# Altium PCB sterio_mic PCB.PcbDoc
Units mm, origin at the board's own origin, x right, y up, seen from the top; angles counter-clockwise.
Board outline 17 x 26.5 mm, 2 copper layers (Top Layer, Bottom Layer), stack 1.57 mm thick; 18 components, 13 nets, 49 pads, 0 vias.
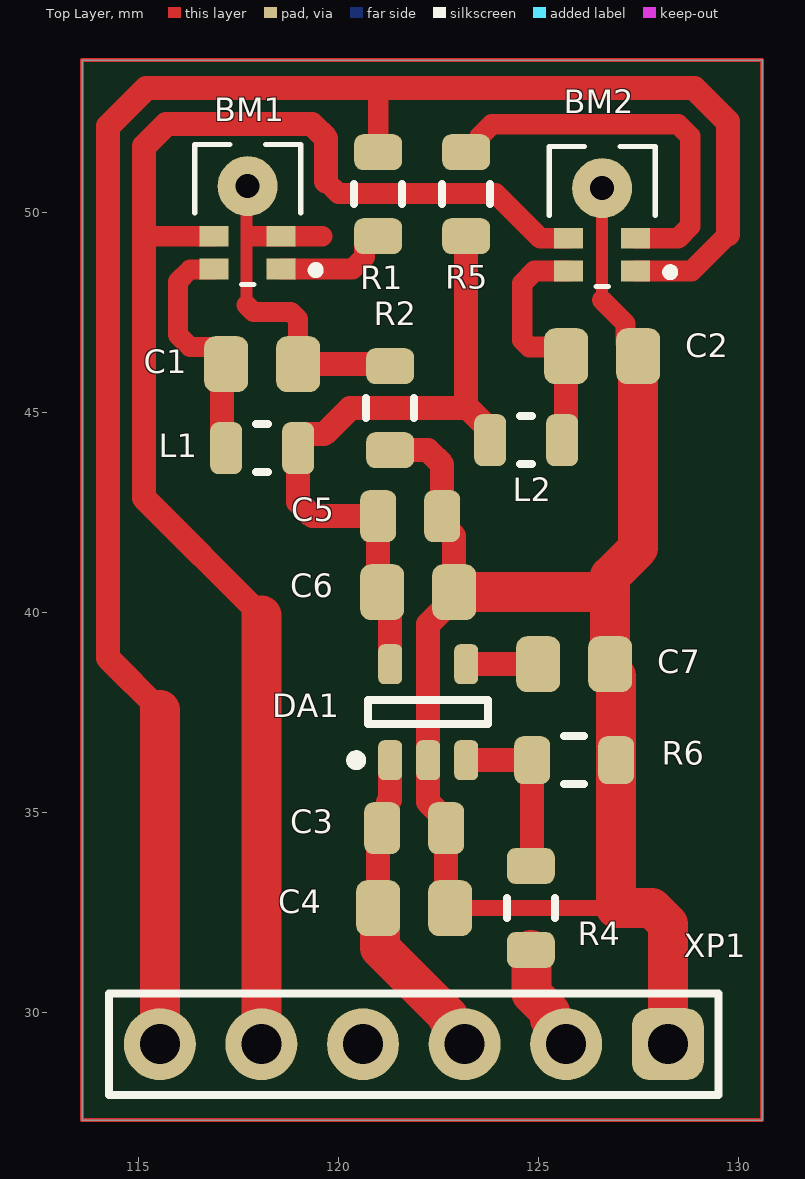
[diagram p0: Top Layer view]
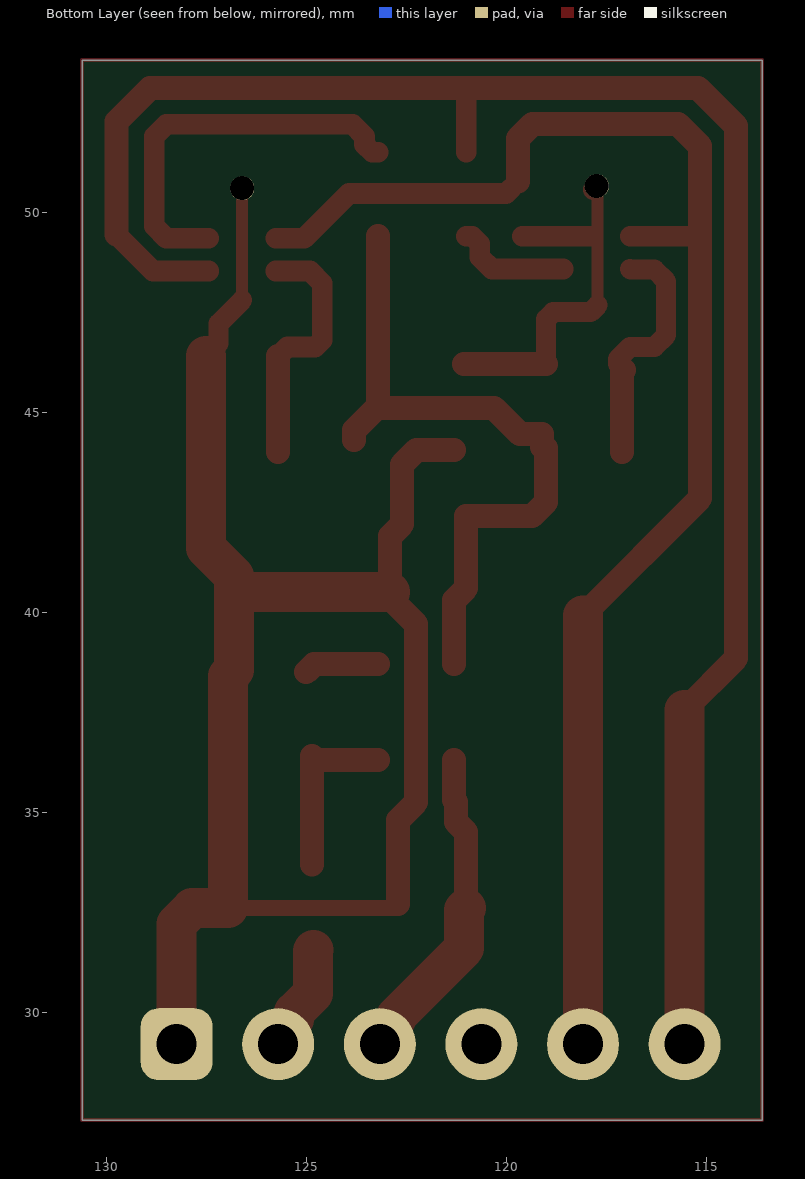
[diagram p1: Bottom Layer view, seen from below]
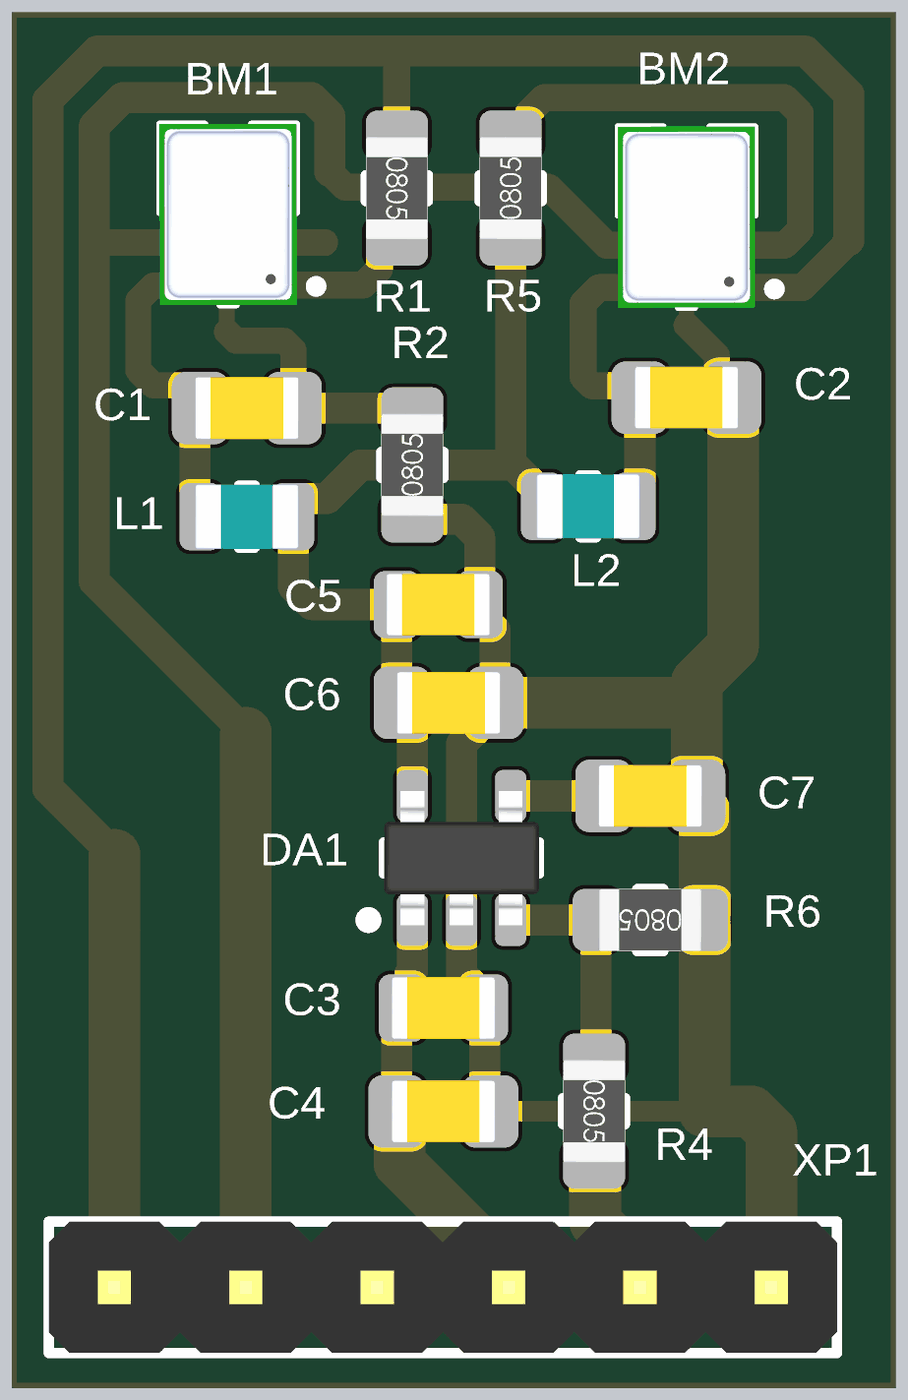
[diagram p2: 3D render of the assembled board from above, using the file's embedded part models]

## Layer stack, top to bottom
Top Solder: solder mask 0.0127, Solder Resist, Dk 3.8
Top Layer: signal copper 0.035
Dielectric: core 1.5, FR-4, Dk 4.5
Bottom Layer: signal copper 0.035
Bottom Solder: solder mask 0.0127, Solder Resist, Dk 3.8

## Board outline
113.6,27.3 113.6,53.8 130.6,53.8 130.6,27.3

## Design rules (kind name [scope] priority, off if disabled: settings)
BoardOutlineClearance [All] p1: gap=0.2 ignorepadtopadclearanceinfootprint=FALSE
Clearance [All] p1: gap=0.3 ignorepadtopadclearanceinfootprint=FALSE
ComponentClearance [All] p1: gap=0.127 collisioncheckmode=3 verticalgap=0.127 showdistances=TRUE
DiffPairsRouting [All] p1: maxlimit=0.254 minlimit=0.127 mostfreqgap=0.127 toplayer_minwidth=0.127 toplayer_maxwidth=25.4 toplayer_prefwidth=0.127 bottomlayer_minwidth=0.127 bottomlayer_maxwidth=25.4 bottomlayer_prefwidth=0.127 maxuncoupledlength=12.7
Height [All] p1: minheight=0 maxheight=1816.048 prefheight=12.7
HoleSize [All] p1: absolutevalues=TRUE maxlimit=6.3 minlimit=0.3 maxpercent=80.000 minpercent=20.000
HoleToHoleClearance [All] p1: gap=0.25 allowstackedmicrovias=FALSE
MinimumAnnularRing [All] p1: minimumring=0.076
MinimumSolderMaskSliver [All] p1: minsoldermaskwidth=0
PlaneClearance [All] p1: clearance=0.127
PlaneConnect PlaneConnectPowerPads [InPadClass('PowerPads')] p1: planeconnectstyle=Direct reliefexpansion=0.508 reliefentries=4 reliefconductorwidth=0.254 reliefairgap=0.254
PlaneConnect [All] p2: planeconnectstyle=Direct reliefexpansion=0.3 reliefentries=4 reliefconductorwidth=0.127 reliefairgap=0.127
PolygonConnect PolygonConnectPowerPads [All vs (InPadClass('PowerPads'))] p1: connectstyle=Direct reliefconductorwidth=0.254 reliefentries=4 polygonreliefangle="90 Angle" airgapwidth=0.254
PolygonConnect [All] p2: connectstyle=Direct reliefconductorwidth=0.127 reliefentries=4 polygonreliefangle="90 Angle" airgapwidth=0.127
RoutingVias [All] p1: holewidth=0.3 width=0.6 viastyle="Through Hole" minholewidth=0.3 minwidth=0.6 maxholewidth=0.6 maxwidth=6.6
SilkToSilkClearance [All] p1: silktosilkclearance=0
SilkToSolderMaskClearance [IsPad] p1: minsilkscreentomaskgap=0.127 clearancetoexposedcopper=TRUE
SolderMaskExpansion [All] p1: expansion=0.075 istentingtop=FALSE
Width [All] p1: maxlimit=25.4 minlimit=0.127 preferedwidth=0.127 minimp=50.000000 maximp=50.000000 favimp=50.000000
20 further rules are at their usual default settings.

## Components (designator, comment, footprint, x,y, rotation, side; value= is the part's Value field where it differs from the comment)
BM1 "MMICT390200012" "5-Terminal LGA_CAV" 117.738,49.952 r180 top
BM2 "MMICT390200012" "5-Terminal LGA_CAV" 126.6,49.9 r180 top
C1 "CC0805KPX7R9BB104" CAPC0805_H0.95_N 118.1,46.2 r0 top
C2 "CC0805KPX7R9BB104" CAPC0805_H0.95_N 126.6,46.4 r0 top
C3 "CL21B106KOQNNNE" CAPC0805_H1.45_N 121.9,34.6 r0 top
C4 "CC0805KPX7R9BB104" CAPC0805_H0.95_N 121.9,32.6 r0 top
C5 "CL21B106KOQNNNE" CAPC0805_H1.45_N 121.8,42.4 r0 top
C6 "CC0805KPX7R9BB104" CAPC0805_H0.95_N 122,40.5 r0 top
C7 "CC0805JKNPO9BN103" CAPC0805_H0.95_N 125.9,38.7 r0 top
DA1 "LP2985A-33DBVRM3" SOT-23-5 122.25,37.5 r90 top
L1 "BLM21PG221SN1D" INDC0805_H1.25_N 118.1,44.1 r0 top
L2 "BLM21PG221SN1D" INDC0805_H1.25_N 124.7,44.3 r180 top
R1 "RC0805FR-070RL" RESC0805_N 121,50.45 r270 top
R2 "RC0805FR-070RL" RESC0805_N 121.3,45.1 r90 top
R4 "RC0805FR-070RL" RESC0805_N 124.813,32.605 r270 top
R5 "RC0805FR-070RL" RESC0805_N 123.2,50.45 r90 top
R6 "RT0805BRB0710KL" RESC0805_N 125.9,36.3 r180 top
XP1 "DS1021-1x6SF11-B" PLS-6(DS-1021-1x6) 121.89,29.2 r180 top

## Footprints (in the part's own frame and the unit in brackets; to place one, negate y for a bottom-side part, rotate by r counter-clockwise, add the part's x,y. Pads: shape width x height; smd on the part's side, far side on the other; paste and mask are expansions set on the pad)
"5-Terminal LGA_CAV" [mm] "Custom LGA for microphone"
  rect 0.725x0.522 smd paste-0.05 mask+0.05: 1(-0.837,1.374) 2(-0.837,0.552) 4(0.837,0.552) 5(0.837,1.374)
  round 1.5 / inner round 0.6 / far side round 0.6 hole 0.6 unplated paste+0: 3(0,-0.7)
  silkscreen extent -1.8,-1.74 1.33,1.76, body extent -1.33,-1.74 1.33,1.76, height 0.98
CAPC0805_H0.95_N [mm] "Chip Capacitor, 2-Leads, Body 2,00x1,25mm, IPC Medium Density"
  rrect50% 1.1x1.4 smd: 1(-0.9,0) 2(0.9,0)
  body extent -1,-0.6 1,0.6, height 0.95
CAPC0805_H1.45_N [mm] "Chip Capacitor, 2-Leads, Body 2,00x1,25mm, IPC High Density"
  rrect50% 0.9x1.3 smd: 1(-0.8,0) 2(0.8,0)
  body extent -1,-0.6 1,0.6, height 1.45
INDC0805_H1.25_N [mm] "Chip Inductor, 2-Leads, Body 2,00x1,25mm, IPC Medium Density"
  rrect50% 0.8x1.3 smd: 1(-0.9,0) 2(0.9,0)
  silkscreen extent -0.15,-0.6 0.15,0.6, body extent -1,-0.62 1,0.63, height 1.25
PLS-6(DS-1021-1x6) [mm] "2.54mm"
  rrect50% 1.8x1.8 hole 1: 1(-6.35,0)
  round 1.8 hole 1: 2(-3.81,0) 3(-1.27,0) 4(1.27,0) 5(3.81,0) 6(6.35,0)
  silkscreen extent -7.62,-1.27 7.62,1.27, body extent -7.62,-1.27 7.62,1.27, height 8.54
RESC0805_N [mm] "Chip Resistor, 2-Leads, Body 2,00x1,25mm, IPC Medium Density"
  rrect50% 0.9x1.2 smd: 1(-1.05,0) 2(1.05,0)
  silkscreen extent -0.25,-0.6 0.25,0.6, body extent -1,-0.6 1,0.6, height 0.44
SOT-23-5 [mm]
  rrect50% 1x0.6 smd: 1(-1.2,0.95) 2(-1.2,0) 3(-1.2,-0.95) 4(1.2,-0.95) 5(1.2,0.95)
  silkscreen extent -1.32,-1.5 0.3,1.92, body extent -1.3,-1.5 1.3,1.5, height 1.1

## Part data
BM1 BM2: library part CMP-SENS-0013-8, "digital MEMS microphone", Case/Package=LGA, Manufacturer=TDK, Author=t.dorakh, HelpURL=https://static.chipdip.ru/lib/672/DOC011672161.pdf, Interface Type=PDM, Manufacturer Part Name=MMICT390200012
C1 C2 C4 C6: library part CMP-CAP-CER-SMD-0001-5, "0805 100nF 50V ±10% X7R", Capacitance=100nF, Case Code (Imperial)=0805, Case Code (Metric)=2012, Dielectric=X7R, Manufacturer=Yageo, Tolerance=10%, Voltage Rating=50V, Author=m.seliadtsou, Case/Package=0805, Depth=850µm, Height=850µm, HelpURL=https://www.yageo.com/upload/media/product/products/datasheet/mlcc/UPY-GPHC_X7R_6.3V-to-50V_20.pdf, Lead Free=Yes, Length=2mm, Manufacturer Part Number=CC0805KPX7R9BB104, Series=СС, Width=1.25mm
C3 C5: library part CMP-CAP-CER-SMD-0082-5, "0805 10uF 16V ±10% X7R", Capacitance=10µF, Case Code (Imperial)=0805, Case Code (Metric)=2012, Dielectric=X7R, Manufacturer="Samsung Electro-Mechanics", Max Operating Temperature=125°C, Min Operating Temperature=-55°C, Tolerance=10%, Voltage Rating=16V, Author=m.boltromeyuk, Case/Package=0805, Depth=1.25mm, Height=1.25mm, HelpURL=https://weblib.samsungsem.com/mlcc/mlcc-ec-data-sheet.do?partNumber=CL21B106KOQNFN, Lead Free=Yes, Length=2mm, Manufacturer Part Number=CL21B106KOQNNNE, Series=CL, Width=1.25mm
C7: library part CMP-CAP-CER-SMD-2016-4, "0805 10nF 50V ±5% NP0", Capacitance=10nF, Case Code (Imperial)=0805, Case Code (Metric)=2012, Dielectric=C0G, Manufacturer=Yageo, Max Operating Temperature=125°C, Min Operating Temperature=-55°C, Tolerance=5%, Voltage Rating=50V, Author=v.ivanchenko, Case/Package=0805, Depth=1.25mm, Height=1.25mm, HelpURL=http://www.yageo.ru/pdf/NP0_16V-to-100V.pdf, Lead Free=Yes, Length=2mm, Manufacturer Part Number=CC0805JKNPO9BN103, Series=CC, Width=1.25mm
DA1: library part CMP-IC-POW_MGMT-LDO0051-6, "150-mA 16-V low-dropout (LDO) voltage regulator with high-accuracy 5-SOT-23 -40 to 125", Case/Package=SOT-23, Dropout Voltage=0.15V, Manufacturer="Texas Instruments", Manufacturer Lifecycle Status=ACTIVE, Max Input Voltage=16V, Max Operating Temperature=125°C, Max Output Current=300mA, Max Output Voltage=3.3V, Min Input Voltage=3.4V, Min Operating Temperature=-40°C, Output Current=150mA, Author=i.auramchyk, Height=1.45mm, HelpURL=https://www.ti.com/product/LP2985A?keyMatch=LP2985&tisearch=universal_search&usecase=partmatches, Length=2.9mm, Lifecycle Status=Production, Manufacturer Part Number=LP2985A-33DBVRM3, Min Output Voltage=3.3V, Mount="Surface mount", Output Configuration=Positive, Output Type=Fixed, Pins=5, RoHS=Compliant, Thickness=1.2mm, Width=1.6mm
L1 L2: library part CMP-IND-0144-1, "9mΩ ±25% 22Ω@100MHz 6A 0805 Ferrite Beads ROHS", Case/Package=0805, DC Resistance (DCR)=9m, Inductance=0µH, Manufacturer="Murata Electronics", Manufacturer Part Number=BLM21PG220SN1D, Max DC Current=6A, Max Operating Temperature=125°C, Min Operating Temperature=-55°C, Saturation Current=0A, Test Frequency=100MHz, Tolerance=25%, Author=m.boltromeyuk, Depth=1.25mm, Height=850µm, HelpURL=https://pim.murata.com/en-global/pim/details/?productCategoryId=ferriteBeadInductortypefilter&partNum=BLM21PG220SN1%23, Lead Free="Lead Free", Length=2mm, Mount=Surface, RMS Current (Irms)=6A, RoHS Compliant=Yes, Series=BLM21, Termination=SMD/SMT, Width=1.25mm
R1 R2 R4 R5: library part CMP-RES-SMD-0511-6, "RES SMD 0 OHM JUMPER 1% 1/8W 0805", Case/Package=0805, Manufacturer=Yageo, Max Operating Temperature=155°C, Max Power Dissipation=125mW, Min Operating Temperature=-55°C, Resistance=0, Tolerance=1%, Voltage Rating=150V, Author="M.S. Koval", HelpURL=https://www.yageo.com/upload/media/product/productsearch/datasheet/rchip/PYu-RC_Group_51_RoHS_L_11.pdf, Manufacturer Part Number=RC0805FR-070RL
R6: library part CMP-RES-SMD-0973-2, "RES SMD 10 KOHM 0.1% 1/8W 0805  10ppm", Case/Package=0805, Manufacturer=Yageo, Max Operating Temperature=155°C, Max Power Dissipation=125mW, Min Operating Temperature=-55°C, Resistance=10k, Temperature Coefficient=±10ppm/C°, Tolerance=0.1%, Voltage Rating=150V, Author=u.sushko, HelpURL=https://www.yageo.com/upload/media/product/productsearch/datasheet/rchip/PYu-RT_1-to-0.01_RoHS_L_14.pdf, Manufacturer Part Number=RT0805BRB0710KL
XP1: library part CMP-CON-B2B-0048-3, "2.54mm, 6 pin, Male, 3A, Vertical mounting, CONNFLY", Color=Black, Contact Current Rating=3A, Contact Resistance=20m, Manufacturer=CONNFLY, Max Operating Temperature=105°C, Min Operating Temperature=-40°C, Voltage Rating=250V, Author=a.antipov, Contact Gender=Male, Contact Plating=Gold, Gender=Non-Gendered, HelpURL=http://outer.connfly.group/static/upload/file/pdf/DS1021.pdf, Manufacturer Part Number=DS1021-1x6SF11-B, Mount="Through Hole", Number of Contacts=6, Orientation=Vertical, Pitch=2.54mm

## Nets (pads, with @x,y where several pads share a name; then routed paths per layer and width w, separated by ;. In a path a pad name is that pad's centre, name@x,y a point inside that pad or via, vN(x,y) a via of type N, cw(c..) or ccw(c..) an arc to the next point about the centre after c; other vN are vias at no path point)
3V3: C5.1 C6.1 DA1.5 L1.2 L2.2 R5.1 | length 17.4
  Top Layer w0.6: L1.2 119,42.751 119.351,42.4 C5.1 121,40.6 C6.1 121.3,40.3 DA1.5 ; L1.2@119.1,44.133 119.1,44.45 119.65,44.45 120.3,45.1 123.25,45.1 ; R5.1 123.2,45.15 123.25,45.1 ; L2.2 123.8,44.55 123.25,45.1
5V0: C3.1 C4.1 DA1.1 XP1.3 | length 8.1
  Top Layer w0.6: C4.1 121,34.5 121.25,34.75 121.25,35.251 121.3,35.301 DA1.1
  Top Layer w1: C4.1 121.05,32.55 121.05,31.601 122.76,29.891 122.76,29.816 123.231,29.346 XP1.3@123.306,29.346
DATA: BM2.1 R1.1 XP1.6 | length 46.9
  Top Layer w0.522: R1.1 121,53 ; BM2.1 128.835,48.526 129.622,49.313 129.622,49.322 129.739,49.439
  Top Layer w0.6: 115.54,37.56 114.25,38.85 114.25,52.15 115.2,53.1 121.022,53.1 ; 121,53 121.061,53.061 121.022,53.1 ; 129.739,49.439 129.739,52.262 128.901,53.1 121.022,53.1
  Top Layer w1: XP1.6 115.54,37.56
EN: DA1.3 R4.1 R6.2 | length 4.4
  Top Layer w0.6: DA1.3 124.75,36.3 124.85,36.4 R4.1@124.85,33.692
GND: BM2.3 C2.2 C3.2 C4.2 C5.2 C6.2 C7.2 DA1.2 R2.1 R6.1 XP1.1 | length 46.6
  Top Layer w0.3: 126.6,47.8 BM2.3 ; C2.2@127.187,46.713 C2.2
  Top Layer w0.4: C4.2@122.7,32.7 C4.2 126.95,32.6
  Top Layer w0.5: 126.6,47.8 127.187,47.213 C2.2@127.187,46.713
  Top Layer w0.6: R2.1 122.249,44.05 122.6,43.699 122.6,42.2 122.9,41.9 C6.2 122.9,40.35 122.25,39.7 ; 122.25,39.64 DA1.2 122.25,35.25 122.7,34.8 C3.2 C4.2@122.7,32.7 ; R6.1 C7.2@126.95,38.687
  Top Layer w1: C6.2 126.8,40.5 ; C7.2@126.8,38.55 126.95,38.4 R6.1 126.95,32.6 127.85,32.6 128.24,32.21 XP1.1 ; C7.2 126.8,40.5 ; C2.2 127.5,41.6 126.8,40.9 126.8,40.5
GND2: BM1.2 BM1.3 C1.2 R2.2 | length 9.7
  Top Layer w0.3: 117.713,47.676 117.713,49.3 ; BM1.3 117.713,50.627 117.713,49.3 ; 117.813,49.4 117.763,49.4 117.763,49.35 117.713,49.3
  Top Layer w0.5: 117.713,47.676 117.888,47.5 118.824,47.5 119,47.324 C1.2
  Top Layer w0.522: BM1.3 BM1.3@117.824,50.566 ; 117.824,49.4 BM1.2 119.6,49.4
  Top Layer w0.6: C1.2 R2.2@121.05,46.2
NetBM1_1: BM1.1 R1.2 | length 3
  Top Layer w0.522: BM1.1 120.355,48.578 120.661,48.884 120.661,49.211 120.85,49.4 R1.2
NetBM1_5: BM1.5 C1.1 L1.1 | length 6.2
  Top Layer w0.5: BM1.5 116.889,48.567 116.293,48.567 116,48.274 116,46.927 116.293,46.635 116.902,46.635 117.2,46.336 C1.1 C1.1@117.05,46.05
  Top Layer w0.6: C1.1@117.05,46.05 117.1,46 L1.1@117.1,44
NetBM2_2: BM2.2 R5.2 | length 9.9
  Top Layer w0.522: R5.2 123.35,51.5 123.539,51.689 123.539,51.894 123.845,52.2 128.494,52.2 128.8,51.894 128.8,49.654 128.494,49.348 BM2.2
NetBM2_5: BM2.5 C2.1 L2.1 | length 6.4
  Top Layer w0.522: C2.1 125.471,46.629 124.777,46.629 124.6,46.806 124.6,48.22 124.906,48.526 BM2.5
  Top Layer w0.6: L2.1@125.7,44 C2.1
NetC7_1: C7.1 DA1.4 | length 1.9
  Top Layer w0.6: DA1.4 124.8,38.7 C7.1@125,38.5
NetR4_2: R4.2 XP1.2 | length 2.8
  Top Layer w0.6: XP1.2@125.5,29.4 XP1.2
  Top Layer w1: R4.2 124.834,31.534 124.834,30.466 125.3,30 125.3,29.816 125.547,29.57 125.547,29.447 XP1.2@125.5,29.4
SCK: BM1.4 BM2.4 XP1.5 | length 38.1
  Top Layer w0.522: 115.15,49.258 115.292,49.4 BM1.4 ; 119.7,50.774 120.006,50.468 123.932,50.468 125.052,49.348 BM2.4
  Top Layer w0.6: 118.08,39.92 115.15,42.85 115.15,49.258 115.15,51.65 115.7,52.2 119.349,52.2 119.7,51.849 119.7,50.774
  Top Layer w1: XP1.5 118.08,39.92
pads on no net: XP1.4
copper on no net: | length 87
  Top Layer w0.1: 113.6,27.3 130.6,27.3 130.6,53.8 113.6,53.8 113.6,27.3

## Silkscreen, mask and mechanical layers (free items; w line width, h text height)
Board Shape:
  the board outline again, w0.1